# Altium PCB DoubleSerial.PcbDoc
Units mm, origin at the board's own origin, x right, y up, seen from the top; angles counter-clockwise.
Board outline 26.92 x 22.99 mm, 2 copper layers (Top Layer, Bottom Layer); 18 components, 19 nets, 84 pads, 10 vias.
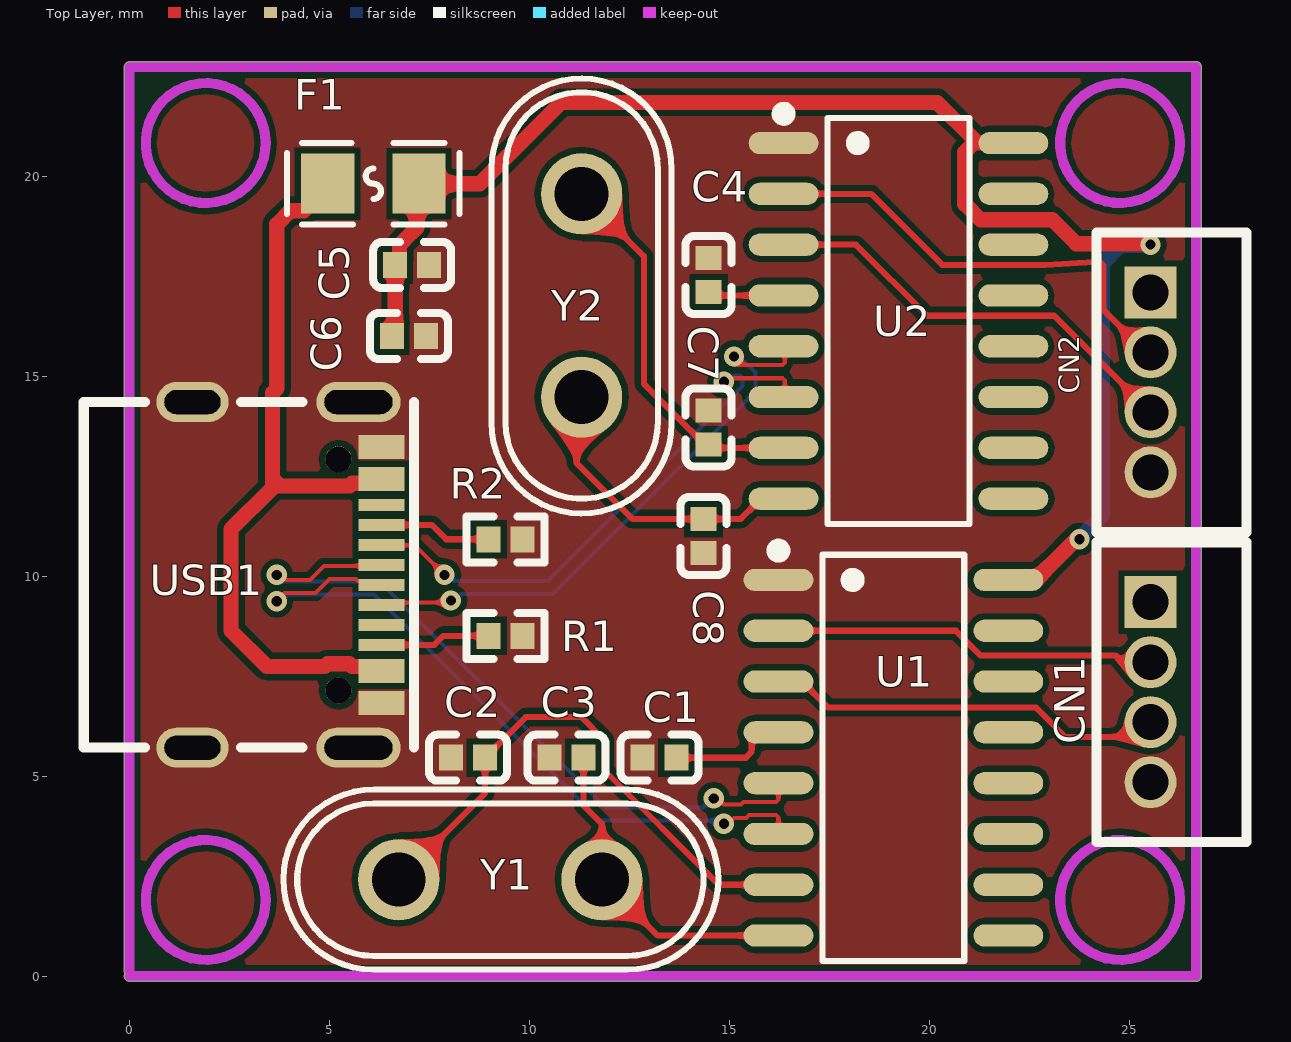
[diagram p0: Top Layer view]
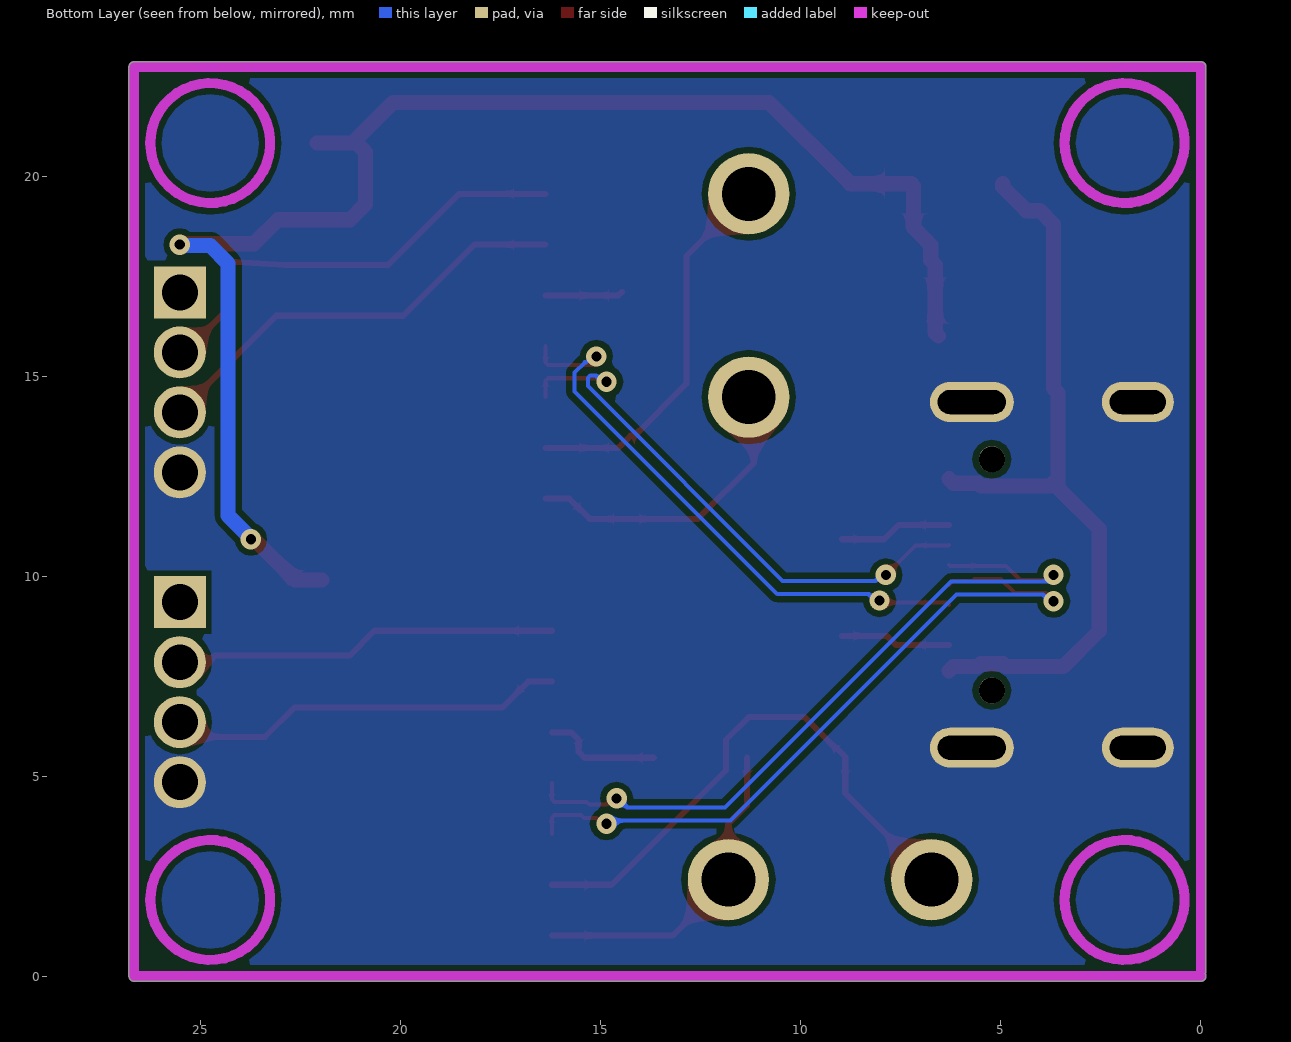
[diagram p1: Bottom Layer view, seen from below]
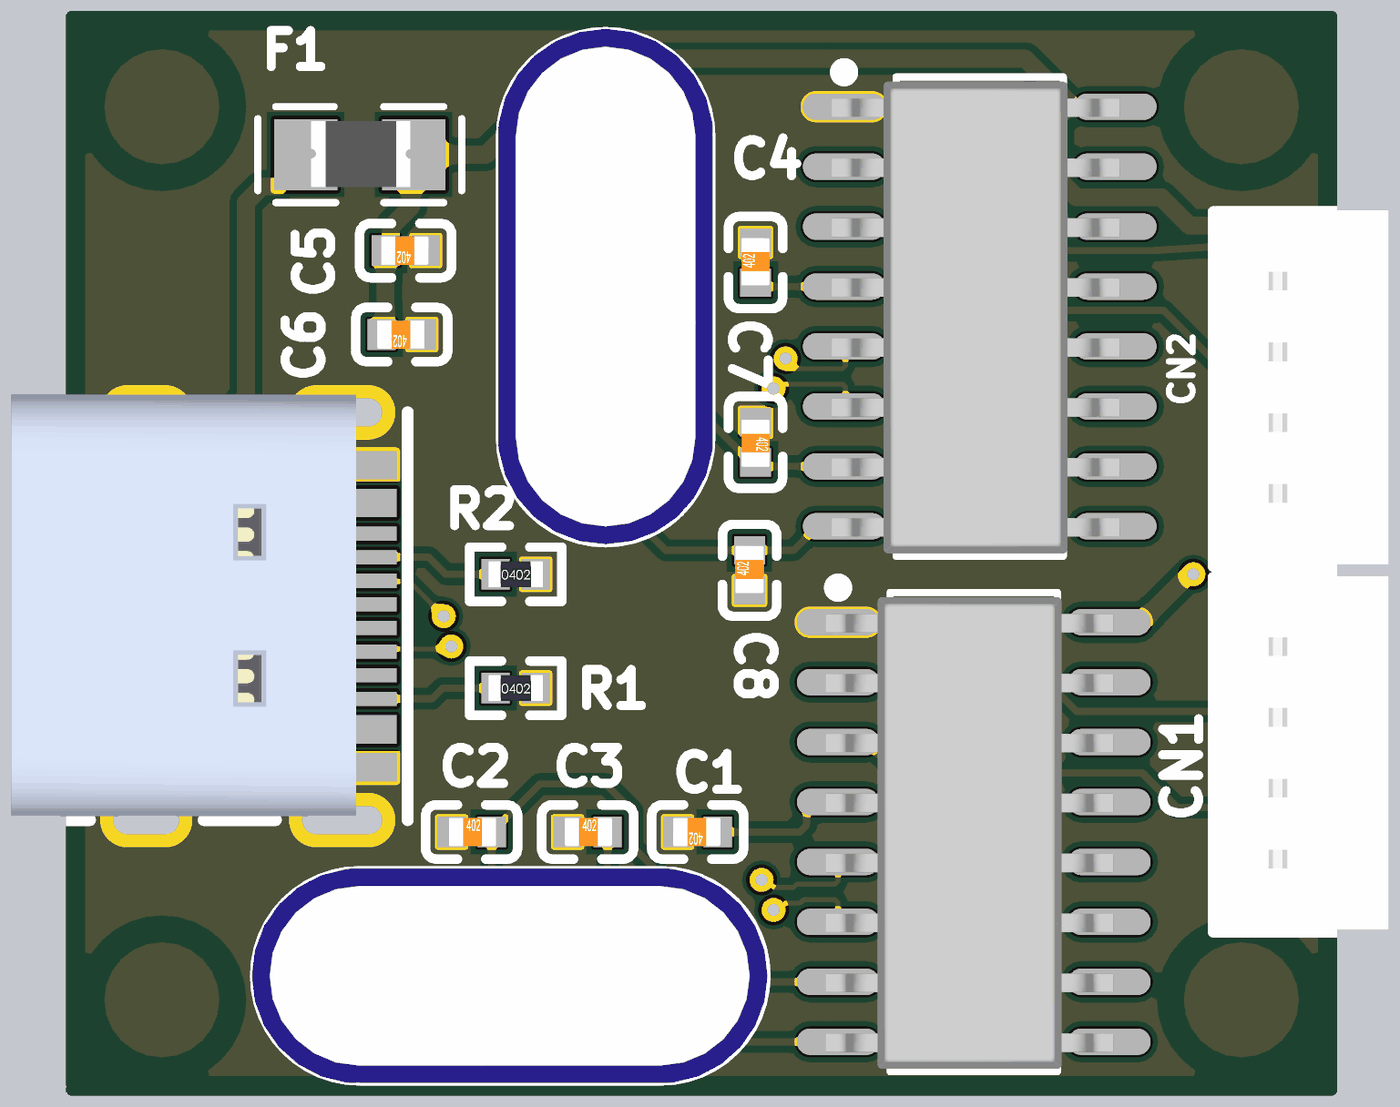
[diagram p2: 3D render of the assembled board from above, using the file's embedded part models]

## Layer stack, top to bottom
Top Solder: solder mask 0.0102, Solder Resist, Dk 3.5
Top Layer: signal copper 0.0356
Dielectric 1: dielectric 0.32, FR-4, Dk 4.8
Bottom Layer: signal copper 0.0356
Bottom Solder: solder mask 0.0102, Solder Resist, Dk 3.5

## Board outline
-0.11,0.064 cw(c0,0.127) -0.127,0.127 -0.127,22.733 cw(c0,22.733) 0,22.86 26.67,22.86 cw(c26.67,22.733) 26.797,22.733 26.797,0 cw(c26.67,0) 26.67,-0.127 0,-0.127 cw(c0,0)

## Design rules (kind name [scope] priority, off if disabled: settings)
Clearance [All] p1: gap=0.152 ignorepadtopadclearanceinfootprint=FALSE
ComponentClearance [All] p1: gap=0 collisioncheckmode=3 verticalgap=0 showdistances=FALSE
DiffPairsRouting [All] p1: maxlimit=0.229 minlimit=0.229 mostfreqgap=0.229 toplayer_minwidth=0.102 toplayer_maxwidth=0.102 toplayer_prefwidth=0.102 bottomlayer_minwidth=0.102 bottomlayer_maxwidth=0.102 bottomlayer_prefwidth=0.102 maxuncoupledlength=12.7
FanoutControl Fanout_BGA [All] p1: bgadir=Out bgaviamode=Centered fanoutstyle=Auto fanoutdirection=Alternating viagrid=0.025 // Fanout_BGA (Default Rule)
HoleSize [All] p1: absolutevalues=TRUE maxlimit=254 minlimit=0.203 maxpercent=80.000 minpercent=20.000
MinimumSolderMaskSliver [All] p1 off: minsoldermaskwidth=0.051
PlaneClearance [All] p1: clearance=0.203
PlaneConnect [All] p1: planeconnectstyle=Direct reliefexpansion=0.508 reliefentries=4 reliefconductorwidth=0.254 reliefairgap=0.254
PolygonConnect [All] p1: connectstyle=Direct reliefconductorwidth=0.254 reliefentries=4 polygonreliefangle="90 Angle" airgapwidth=0.254
RoutingVias [All] p1: holewidth=0.203 width=0.406 viastyle="Through Hole" minholewidth=0.152 minwidth=0.305 maxholewidth=0.711 maxwidth=1.27
SilkToSilkClearance [All] p1: silktosilkclearance=0
SilkToSolderMaskClearance [IsPad] p1: minsilkscreentomaskgap=0 clearancetoexposedcopper=TRUE
SolderMaskExpansion [All] p1: expansion=0.076 istentingtop=FALSE
Width [All] p1: maxlimit=254 minlimit=0.152 preferedwidth=0.152
21 further rules are at their usual default settings.

## Classes and differential pairs
differential pair USB2: +USB2_P -USB2_N
differential pair USB1: +USB1_P -USB1_N

## Components (designator, comment, footprint, x,y, rotation, side; value= is the part's Value field where it differs from the comment)
C1 "100nF (104) 10% 16V" 0402_C 13.252,5.461 r180 top
C2 "22pF (220) 5% 50V" 0402_C 8.465,5.461 r0 top
C3 "22pF (220) 5% 50V" 0402_C 10.922,5.461 r0 top
C4 "100nF (104) 10% 16V" 0402_C 14.478,17.526 r90 top
C5 "10uF (106) 20% 6.3V" 0402_C 7.068,17.78 r180 top
C6 "100nF (104) 10% 16V" 0402_C 6.985,16.002 r180 top
C7 "22pF (220) 5% 50V" 0402_C 14.478,13.716 r270 top
C8 "22pF (220) 5% 50V" 0402_C 14.351,11.005 r90 top
CN1 "1.5-4A" CONN-TH_1.5-4A 25.527,7.099 r270 top
CN2 "1.5-4A" CONN-TH_1.5-4A 25.527,14.846 r270 top
F1 "ASMD0805-050" ASMD0805 6.096,19.812 r0 top
R1 "5.1KΩ (5101) ±1%" 0402_R 9.398,8.509 r0 top
R2 "5.1KΩ (5101) ±1%" 0402_R 9.398,10.922 r0 top
U1 "CH340" SOP-16_L10.0 19.098,5.461 r270 top
U2 "CH340" SOP-16_L10.0 19.225,16.383 r270 top
USB1 "TYPE-C16PIN" TYPE-C-SMD 3.937,10.033 r270 top
Y1 "XTAL" XTAL_socket 9.271,2.413 r180 top
Y2 "XTAL" XTAL_socket 11.303,17.018 r90 top

## Footprints (in the part's own frame and the unit in brackets; to place one, negate y for a bottom-side part, rotate by r counter-clockwise, add the part's x,y. Pads: shape width x height; smd on the part's side, far side on the other; paste and mask are expansions set on the pad)
0402_C [mm]
  rect 0.6x0.65 smd mask+0.051: 1(-0.425,0) 2(0.425,0)
  silkscreen extent -0.97,-0.58 0.97,0.58, body extent -0.48,-0.3 0.52,0.3, height 0.2
0402_R [mm]
  rect 0.6x0.65 smd mask+0.051: 1(-0.425,0) 2(0.425,0)
  silkscreen extent -0.97,-0.58 0.97,0.58, body extent -0.57,-0.27 0.58,0.28, height 0.41
ASMD0805 [mm]
  rect 1.335x1.5 smd: 1(-1.142,0) 2(1.142,0)
  silkscreen extent -2.16,-1.02 2.16,1.02, body extent -1.03,-0.69 1.07,0.71, height 0.83
CONN-TH_1.5-4A [mil]
  rect 51.2x51.2 hole 35.4 mask+2: 1(-88.6,0)
  round 51.2 hole 35.4 mask+2: 2(-29.5,0) 3(29.5,0) 4(88.6,0)
  silkscreen extent -148,-53 148,95, body extent -149,-55 146,93, height 183
SOP-16_L10.0 [mm]
  oval 0.559x1.745 smd mask+0.051: 1(-4.445,-2.873) 2(-3.175,-2.873) 3(-1.905,-2.873) 4(-0.635,-2.873) 5(0.635,-2.873) 6(1.905,-2.873) 7(3.175,-2.873) 8(4.445,-2.873) 9(4.445,2.873) 10(3.175,2.873) 11(1.905,2.873) 12(0.635,2.873) 13(-0.635,2.873) 14(-1.905,2.873) 15(-3.175,2.873) 16(-4.445,2.873)
  silkscreen extent -5.33,-3.02 5.08,1.77, body extent -4.98,-3.14 5.02,2.97, height 1.75
TYPE-C-SMD [mm]
  oval 1x2.1 hole 0.6 slot 1.7 at 90 deg: 1(-4.32,1.787) 2(4.32,1.787)
  oval 1x1.8 hole 0.6 slot 1.4 at 90 deg: 3(-4.32,-2.362) 4(4.32,-2.362)
  rect 0.6x1.15 smd: A1B12(-3.2,2.362) A4B9(-2.4,2.362) B1A12(3.2,2.362) B4A9(2.4,2.362)
  rect 0.3x1.15 smd: A5(-1.25,2.362) A6(-0.25,2.362) A7(0.25,2.362) A8(-1.75,2.362) B5(1.75,2.362) B6(0.75,2.362) B7(-0.75,2.362) B8(1.25,2.362)
  round 0.65 hole 0.65 unplated: ""(-2.89,1.288) ""(2.89,1.288)
  silkscreen extent -4.32,-5.08 4.32,3.17, body extent -4.7,-5.22 4.24,2.68, height 1.61
XTAL_socket [mil]
  round 80 hole 53: 1(100,0) 2(-100,0)
  silkscreen extent -215,-89 214,89, body extent -214,-89 214,89, height 102

## Part data
C1 C4 C6: library part "0402 100nF (104) 10% 16V", "贴片电容", Package=0402, SuppliersPartNumber=C1525, ComponentLink1Description=供应商链接, ComponentLink1URL=http://www.szlcsc.com/product/details_1877.html, Supplier=LC
C2 C3 C7 C8: library part "0402 22pF (220) 5% 50V", "贴片电容", Package=0402, SuppliersPartNumber=C1555, ComponentLink1Description=供应商链接, ComponentLink1URL=http://www.szlcsc.com/product/details_1907.html, Supplier=LC
C5: library part "0402 10uF (106) 20% 6.3V", "贴片电容", Package=0402, SuppliersPartNumber=C15525, ComponentLink1Description=供应商链接, ComponentLink1URL=http://www.szlcsc.com/product/details_16204.html, Supplier=LC
CN1 CN2: Current Rating (Max)=1A, JLCPCB Part Class="Extended Part", Manufacturer=CAX(创都), Operating Temperature Range=-25~+85, Add into BOM=yes, Convert to PCB=yes, Datasheet=https://atta.szlcsc.com/upload/public/pdf/source/20200907/C722655_2C388E20D41359457DA4667FBF76842B.pdf, Device=1.5-4A, Gender=公型插针, LCSC Part Name=1.5-4A, Manufacturer Part=1.5-4A, Mounting Style=直插, Number of PINs Per Row=4, Number of Rows=1, Pins Structure=1x4P, Pitch=1.5mm, Reference Series=ZH, Row Spacing=-, Supplier=LCSC, Supplier Footprint=插件,P=1.5mm, Supplier Part=C722668, Symbol=1.5-4A_C722668
F1: BOM_JLCPCB Part Class="Extended Part", BOM_Manufacturer=JDTFUSE, BOM_Manufacturer Part=ASMD0805-050, BOM_Supplier=LCSC, BOM_Supplier Part=C135329, Contributor=LCSC, spicePre=F, spiceSymbolName=ASMD0805-050
R1 R2: library part "0402 5.1KΩ (5101) 1%", "贴片电阻", Package=0402, SuppliersPartNumber=C25905, ComponentLink1Description=供应商链接, ComponentLink1URL=http://www.szlcsc.com/product/details_26648.html, Supplier=LC
U1 U2: "USB to serial", Package=SOIC-16_150mil, SuppliersPartNumber=C14267, ComponentLink1Description=供应商链接, ComponentLink1URL=http://www.szlcsc.com/product/details_14927.html, Supplier=LC
USB1: Current Rating - Power (Max)=3A, JLCPCB Part Class="Extended Part", LCSC Part Name="Type-C 母座 卧贴 快充闪充 停产", Manufacturer="SHOU HAN(首韩)", Operating Temperature Range=-40~+85, Add into BOM=yes, Connector Type=Type-C, Convert to PCB=yes, Datasheet=https://atta.szlcsc.com/upload/public/pdf/source/20190521/C393939_7B9043D4CF1026AF443AB60D91FBCD5C.pdf, Device=TYPE-C16PIN, Gender=母座, Manufacturer Part=TYPE-C16PIN, Mounting Style=卧贴, Number of Contacts=16, Number of Ports=1, Standard=-, Supplier=LCSC, Supplier Footprint=SMD, Supplier Part=C393939, Symbol=TYPE-C16PIN
Y1 Y2: "Crystal Oscillator", LatestRevisionDate=17-Jul-2002, LatestRevisionNote="Re-released for DXP Platform.", PackageDescription="Crystal, Thru-Hole; 2 Leads; Body 3.1 x 8.2 mm (Dia.xH)", PackageReference=R38, Published=8-Jun-2000, Publisher="Altium Limited"

## Via types
v1: diameter 0.508, hole 0.254, Top Layer to Bottom Layer, 10 vias

## Nets (pads, with @x,y where several pads share a name; then routed paths per layer and width w, separated by ;. In a path a pad name is that pad's centre, name@x,y a point inside that pad or via, vN(x,y) a via of type N, cw(c..) or ccw(c..) an arc to the next point about the centre after c; other vN are vias at no path point)
5VD: C5.2 C6.2 F1.2 U1.16 U2.16 | length 37.7
  Top Layer w0.381: C6.2 6.643,16.085 C5.2 6.752,17.889 6.752,18.278 6.867,18.392 6.867,18.398 7.183,18.714 7.183,19.756 F1.2 8.763,19.812 10.795,21.844 20.193,21.844 21.082,20.955 21.209,20.828 ; U1.16 22.649,9.906 23.665,10.922 v1(23.749,10.922) ; U2.16 21.209,20.828 ; v1(25.527,18.288) 25.503,18.312 23.669,18.312 23.071,18.91 21.273,18.91 20.883,19.3 20.883,20.605 21.106,20.828 21.209,20.828
  Bottom Layer w0.381: v1(23.749,10.922) 23.749,10.946 24.32,11.518 24.32,17.819 24.765,18.264 25.503,18.264 v1(25.527,18.288)
CH340C1_Rx: CN1.3 U1.3 | length 9.8
  Top Layer w0.152: U1.3 16.819,7.366 17.47,6.715 22.664,6.715 23.399,5.979 25.311,5.979 CN1.3@25.4,5.89
CH340C1_Tx: CN1.2 U1.2 | length 9.7
  Top Layer w0.152: U1.2 20.659,8.636 21.282,8.014 24.653,8.014 25.277,7.389 CN1.2@25.4,7.389
CH340C2_Rx: CN2.3 U2.3 | length 10.9
  Top Layer w0.152: U2.3@16.383,18.288 18.161,18.288 19.939,16.51 23.114,16.51 CN2.3
CH340C2_Tx: CN2.2 U2.2 | length 11.5
  Top Layer w0.152: U2.2@16.383,19.558 18.542,19.558 20.32,17.78 22.902,17.78 24.128,17.859 24.255,17.859 24.344,17.77 24.344,16.656 25.404,15.596 CN2.2
GND: C1.2 C2.1 C3.1 C4.2 C5.1 C6.1 C7.1 C8.1 CN1.4 CN2.4 R1.2 R2.2 U1.1 U2.1 USB1.1 USB1.2 USB1.3 USB1.4 USB1.A1B12 USB1.B1A12
NetC1_1: C1.1 U1.4 | length 3
  Top Layer w0.152: C1.1 15.409,5.461 15.555,5.607 15.555,5.908 15.742,6.096 U1.4
NetC2_2: C2.2 U1.7 Y1.1 | length 13.9
  Top Layer w0.152: Y1.1 8.89,4.572 C2.2 8.89,5.486 9.114,5.71 9.139,5.71 9.906,6.477 11.303,6.477 11.876,5.904 11.876,5.142 14.732,2.286 U1.7
NetC3_2: C3.2 U1.8 Y1.2 | length 8.2
  Top Layer w0.152: C3.2 11.347,4.274 11.811,3.81 Y1.2 13.208,1.016 U1.8
NetC4_1: C4.1 U2.4 | length 1.9
  Top Layer w0.152: C4.1 14.561,17.018 U2.4@16.383,17.018
NetC7_2: C7.2 U2.7 Y2.1 | length 9.6
  Top Layer w0.152: Y2.1 12.86,18.001 12.86,14.81 14.156,13.515 14.254,13.515 C7.2 14.561,13.208 U2.7@16.383,13.208
NetC8_2: C8.2 U2.8 Y2.2 | length 7.7
  Top Layer w0.152: Y2.2 11.176,14.351 11.176,12.827 12.573,11.43 C8.2 15.282,11.43 15.79,11.938 U2.8@16.383,11.938
NetR1_1: R1.1 USB1.B5 | length 2.8
  Top Layer w0.152: USB1.B5 7.624,8.283 7.85,8.509 R1.1
NetR2_1: R2.1 USB1.A5 | length 2.8
  Top Layer w0.152: USB1.A5 7.556,11.283 7.917,10.922 R2.1
USB1_N: U1.6 USB1.A7 | length 18.4
  Top Layer w0.102: v1(3.683,9.373) 3.683,9.384 3.876,9.577 4.652,9.577 5.003,9.928 5.66,9.928 5.706,9.882 6.2,9.882 USB1.A7 ; v1(14.859,3.81) 14.969,3.81 15.115,3.956 15.422,3.956 15.492,4.026 16.166,4.026 16.226,3.966 U1.6
  Bottom Layer w0.102: v1(3.683,9.373) 3.781,9.373 3.946,9.538 6.109,9.538 11.759,3.888 14.781,3.888 v1(14.859,3.81)
USB1_P: U1.5 USB1.A6 | length 18.4
  Top Layer w0.102: v1(3.683,10.033) 3.793,10.033 3.919,9.907 4.515,9.907 4.866,10.259 6.275,10.259 USB1.A6 ; v1(14.605,4.445) 14.709,4.445 14.868,4.287 15.285,4.287 15.355,4.356 16.166,4.356 16.226,4.416 U1.5
  Bottom Layer w0.102: v1(3.683,10.033) 3.683,9.978 3.788,9.873 3.941,9.873 3.946,9.868 6.246,9.868 11.896,4.218 14.342,4.218 14.569,4.445 v1(14.605,4.445)
USB2_N: U2.6 USB1.B7 | length 13.9
  Top Layer w0.102: USB1.B7 6.312,10.77 7.137,10.77 v1(7.874,10.033) ; 15.113,14.948 16.323,14.948 16.383,14.888 U2.6@16.383,14.478
  Bottom Layer w0.102: v1(7.874,10.033) 7.983,10.033 8.137,9.879 10.454,9.879 15.325,14.75 15.325,14.958 15.265,15.017 15.122,15.017 14.963,14.859 v1(14.859,14.859)
USB2_P: U2.5 USB1.B6 | length 14.5
  Top Layer w0.102: USB1.B6 6.354,9.338 7.98,9.338 v1(8.034,9.392) ; v1@15.113,15.278 16.323,15.278 16.383,15.338 U2.5@16.383,15.748
  Bottom Layer w0.102: v1(8.034,9.392) 8.14,9.392 8.297,9.549 10.591,9.549 15.655,14.613 15.655,15.095 15.402,15.348 15.369,15.348 15.223,15.494 v1(15.113,15.494)
VBUS: F1.1 USB1.A4B9 USB1.B4A9 | length 19.5
  Top Layer w0.381: 3.587,12.433 3.692,12.328 3.765,12.255 5.501,12.255 5.57,12.324 6.19,12.324 USB1.A4B9 ; F1.1 4.954,19.73 4.362,19.138 4.025,19.138 3.683,18.796 3.683,14.696 3.573,14.586 3.573,12.433 3.573,12.209 2.54,11.176 2.54,8.636 3.433,7.743 4.88,7.743 4.948,7.811 5.501,7.811 5.57,7.743 6.19,7.743 USB1.B4A9
pads on no net: CN1.1 CN2.1 U1.9 U1.10 U1.11 U1.12 U1.13 U1.14 U1.15 U2.9 U2.10 U2.11 U2.12 U2.13 U2.14 U2.15 USB1. USB1.A8 USB1.B8

## Polygon pours and split planes (outlines as drawn)
GND on Top Layer "GND_L01_P000" (solid, pour order 0): -0.11,0.064 cw(c0,0.127) -0.127,0.127 -0.127,22.733 cw(c0,22.733) 0,22.86 26.67,22.86 cw(c26.67,22.733) 26.797,22.733 26.797,0 cw(c26.67,0) 26.67,-0.127 0,-0.127 cw(c0,0)
GND on Bottom Layer "GND_L02_P001" (solid, pour order 1): -0.11,0.064 cw(c0,0.127) -0.127,0.127 -0.127,22.733 cw(c0,22.733) 0,22.86 26.67,22.86 cw(c26.67,22.733) 26.797,22.733 26.797,0 cw(c26.67,0) 26.67,-0.127 0,-0.127 cw(c0,0)

## Keep-outs
Keep-Out Layer:
  circle w0.254: c24.765,1.905 r1.5
  circle w0.254: c24.765,20.828 r1.5
  circle w0.254: c1.905,20.828 r1.5
  circle w0.254: c1.905,1.905 r1.5
  lines w0.254: 22.86,22.733 26.67,22.733 ; 26.67,22.733 26.67,0 0,0 0,22.733 26.67,22.733

## Silkscreen, mask and mechanical layers (free items; w line width, h text height)
Mechanical 1:
  circle w0.254: c24.765,1.9 r1.5
  circle w0.254: c24.765,20.828 r1.5
  circle w0.254: c1.905,20.828 r1.5
  circle w0.254: c1.9,1.9 r1.5
  lines w0.254: 0,0 26.67,0 26.67,22.733 0,22.733 0,0.127 0,0